# EAGLE board cherry-switch-board (EAGLE 9.4.0)
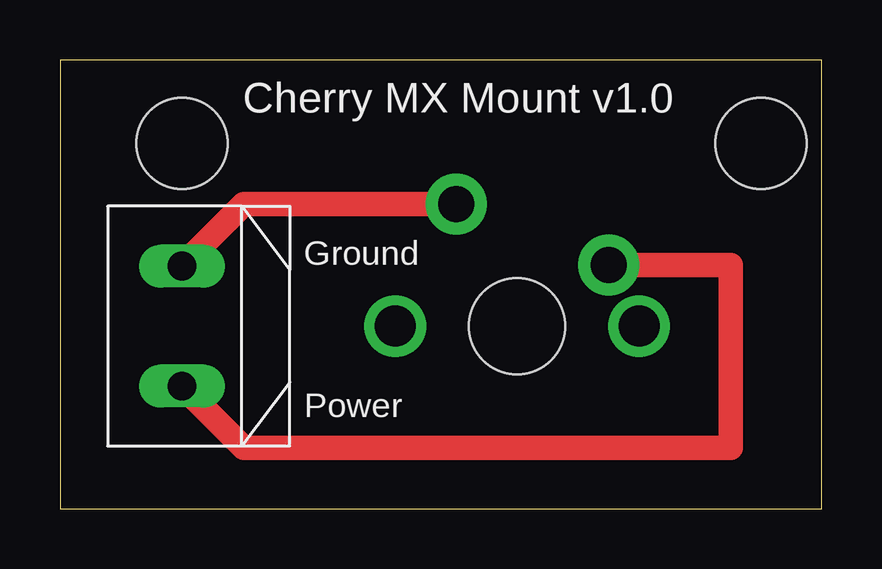
[diagram p0: board, top side]
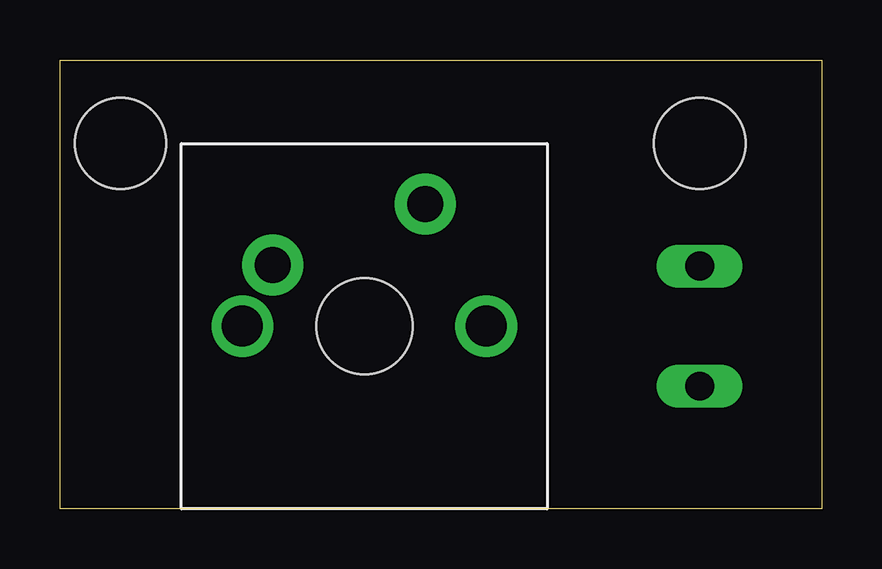
[diagram p1: board, bottom side, seen from below]

Size 31.73 x 18.72 mm. Coordinates in mm from the lower left corner, seen from the top.
Outline: 0,0 31.73,0 31.73,18.72 0,18.72 0,0
Copper layers (1*16): Top 0.035559375mm / dielectric 1.6mm / Bottom 0.035559375mm
Design rules "oshpark-2layer": minimum track width 6mil, minimum drill 10mil, track to track 6mil, track to pad 6mil, pad to pad 6mil, via to via 6mil, smd to smd 6mil, copper to edge 15mil, drill to drill 6mil, minimum pad ring 5mil, minimum via ring 5mil, stop-mask expansion 2.5mil, vias tented up to drill 0mil, thermal gap 10mil
Holes 3.81 mm at 5.08,15.24 29.21,15.24

## Footprints (pad centres in the part's own frame; a part is rotated, then mirrored left to right if it is on the bottom)
CHERRY-MX = drill 1.714 pad 1.93: P$3 -5.08,0; P$4 5.08,0 | drill 1.5 pad 2.54: SW1 -3.81,2.54; SW2 2.54,5.08 | hole 4: 0,0
KF301-2P = drill 1.2 pad 1.778 long: 1 -2.5,0; 2 2.5,0

## Placement (x,y rotation side)
FRAME1  FRAME-LETTER  [CREATIVE_COMMONS]  -80.01,16.51 0 top  (outside the outline)
U$1  CHERRY-MX  [CHERRY-MX]  19.05,7.62 0 bottom
U$2  TERMINAL_2P  [KF301-2P]  5.08,7.62 90 top

## Library data of the parts
FRAME1 = SparkFun-Aesthetics
U$1 = cherrymx
U$2 = KF301-2P-Terminal

## Nets
GROUND: U$1.SW2 U$2.2
POWER: U$1.SW1 U$2.1

## Tracks (layer width: path | path; a pad name or v marks a point on that pad's centre or on a via)
GROUND
  Top 1.016: U$2.2 7.66,12.7 U$1.SW2
POWER
  Top 1.016: U$2.1 7.66,2.54 27.94,2.54 27.94,10.16 U$1.SW1

## Text on the board
tPlace: Cherry MX Mount v1.0 | Ground | Power